# EAGLE board CT_schematic (EAGLE 7.6.0)

Size 100 x 80 mm. Coordinates in mm from the lower left corner, seen from the top.
Outline: 0,0 100,0 100,80 0,80 0,0
Copper layers (1*16): Top 0.035mm / dielectric 1.5mm / Bottom 0.035mm
Design rules "default": minimum track width 10mil, minimum drill 24mil, track to track 8mil, track to pad 8mil, pad to pad 8mil, via to via 8mil, smd to smd 8mil, copper to edge 40mil, drill to drill 8mil, minimum pad ring 10mil, minimum via ring 8mil, stop-mask expansion 4mil, vias tented up to drill 0mil, thermal gap 10mil

## Footprints (pad centres in the part's own frame; a part is rotated, then mirrored left to right if it is on the bottom)
C0603 = smd 0.8 x 0.8: 1 -0.762,0; 2 0.762,0
C0402 = smd 0.5 x 0.5: 1 -0.508,0; 2 0.508,0
C0805 = smd 1.2 x 1.3: 1 -1.016,0; 2 1.016,0
C1206 = smd 1.3 x 1.6: 1 -1.524,0; 2 1.524,0
L0603 = smd 0.8 x 0.8: 1 -0.762,0; 2 0.762,0
DR1040 = smd 1.6 x 3.2: 1 -4.458,0; 2 4.458,0
R0603 = smd 0.8 x 0.8: 1 -0.762,0; 2 0.762,0
WLCSP104 = smd 0.229 x 0.229: A1 -1.6,2.2; A2 -1.2,2.2; A3 -0.8,2.2; A4 -0.4,2.2; A5 0,2.2; A6 0.4,2.2; A7 0.8,2.2; A8 1.2,2.2; A9 1.6,2.2; B1 -1.6,1.8; B2 -1.2,1.8; B3 -0.8,1.8; B4 -0.4,1.8; B5 0,1.8; B6 0.4,1.8; B7 0.8,1.8; B8 1.2,1.8; B9 1.6,1.8; C1 -1.6,1.4; C2 -1.2,1.4; C3 -0.8,1.4; C4 -0.4,1.4; C5 0,1.4; C6 0.4,1.4; C7 0.8,1.4; C8 1.2,1.4; C9 1.6,1.4; D1 -1.6,1; D2 -1.2,1; D3 -0.8,1; D4 -0.4,1; D5 0,1; D6 0.4,1; D7 0.8,1; D8 1.2,1; D9 1.6,1; E1 -1.6,0.6; E2 -1.2,0.6; E3 -0.8,0.6; E4 -0.4,0.6; E6 0.4,0.6; E7 0.8,0.6; E8 1.2,0.6; E9 1.6,0.6; F1 -1.6,0.2; F2 -1.2,0.2; F3 -0.8,0.2; F4 -0.4,0.2; F6 0.4,0.2; F7 0.8,0.2; F8 1.2,0.2; F9 1.6,0.2; G1 -1.6,-0.2; G2 -1.2,-0.2; G3 -0.8,-0.2; G4 -0.4,-0.2; G6 0.4,-0.2; G7 0.8,-0.2; G8 1.2,-0.2; G9 1.6,-0.2; H1 -1.6,-0.6; H2 -1.2,-0.6; H3 -0.8,-0.6; H4 -0.4,-0.6; H6 0.4,-0.6; H7 0.8,-0.6; H8 1.2,-0.6; H9 1.6,-0.6; J1 -1.6,-1; J2 -1.2,-1; J3 -0.8,-1; J4 -0.4,-1; J5 0,-1; J6 0.4,-1; J7 0.8,-1; J8 1.2,-1; J9 1.6,-1; K1 -1.6,-1.4; K2 -1.2,-1.4; K3 -0.8,-1.4; K4 -0.4,-1.4; K5 0,-1.4; K6 0.4,-1.4; K7 0.8,-1.4; K8 1.2,-1.4; K9 1.6,-1.4; L1 -1.6,-1.8; L2 -1.2,-1.8; L3 -0.8,-1.8; L4 -0.4,-1.8; L5 0,-1.8; L6 0.4,-1.8; L7 0.8,-1.8; L8 1.2,-1.8; L9 1.6,-1.8; M1 -1.6,-2.2; M2 -1.2,-2.2; M3 -0.8,-2.2; M4 -0.4,-2.2; M5 0,-2.2; M6 0.4,-2.2; M7 0.8,-2.2; M8 1.2,-2.2; M9 1.6,-2.2
SOIC-8 = smd 1.6 x 0.6: 1 -2.7,1.905 | smd 1.55 x 0.6: 2 -2.7,0.635; 3 -2.7,-0.635; 4 -2.7,-1.905; 5 2.7,-1.905; 6 2.7,-0.635; 7 2.7,0.635; 8 2.7,1.905
LGA14R35P5X6_200X200X100 = smd 0.35 x 0.15: 1 -0.8,0.525; 2 -0.8,0.175; 3 -0.8,-0.175; 4 -0.8,-0.525; 8 0.8,-0.525; 9 0.8,-0.175; 10 0.8,0.175; 11 0.8,0.525 | smd 0.15 x 0.35: 5 -0.35,-0.8; 6 0,-0.8; 7 0.35,-0.8; 12 0.35,0.8; 13 0,0.8; 14 -0.35,0.8
FCI_10118193-0001LF = smd 0.4 x 1.35: 1 -1.3,2.675; 2 -0.65,2.675; 3 0,2.675; 4 0.65,2.675; 5 1.3,2.675 | smd 1.6 x 1.4: 6 -3.2,2.45; 7 3.2,2.45 | smd 1.9 x 1.9: 8 -1.2,0; 9 1.2,0 | hole 0.5: -3.3,0; 3.3,0
SOT143B = smd 1 x 0.7: 1 -0.75,-1 | smd 0.6 x 0.7: 2 0.95,-1; 3 0.95,1; 4 -0.95,1
ABS07-32.768KHZ-7-T = smd 1.1 x 2.4: 1 -2.5,0; 2 0,0
ASFL1 = smd 1.7 x 1.5: 1 -1.27,-1.1; 2 1.27,-1.1; 3 1.27,1.1; 4 -1.27,1.1
TSOT-23-5 = smd 1.3 x 0.62: 1 -1.31,0.95; 2 -1.31,0; 3 -1.31,-0.95; 4 1.31,-0.95; 5 1.31,0.95
DFN8_2X3MC = smd 0.813 x 0.305: 1 -1.398,0.75; 2 -1.398,0.25; 3 -1.398,-0.25; 4 -1.398,-0.75; 5 1.398,-0.75; 6 1.398,-0.25; 7 1.398,0.25; 8 1.398,0.75 | smd 1.753 x 1.549: 9 0,0
JST-2-SMD = smd 1 x 4.6: 1 -1,-3.7; 2 1,-3.7 | smd 1.6 x 3.4: NC1 -3.4,1.5; NC2 3.4,1.5
SON-6 = smd 0.55 x 0.3: 1 -0.355,0.5 | smd 0.52 x 0.3: 2 -0.37,0; 3 -0.37,-0.5; 4 0.37,-0.5; 5 0.37,0; 6 0.37,0.5
SW_4-1437565-2 = smd 1.4 x 2.1: 1 -2.23,4.55; 2 -2.23,-4.55; 3 2.23,4.55; 4 2.23,-4.55
LGM67K-G1J2-24-Z = smd 0.8 x 1.4: A -2,0; C 0,0
NC7SZ125M5X = smd 1.3 x 0.7: 1 -1.3,0.95; 2 -1.3,0; 3 -1.3,-0.95; 4 1.3,-0.95; 5 1.3,0.95
DUMMY_PACKAGE_128 = drill 0.3: 1 0,-1; 2 1.5,-1; 3 3,-1

## Placement (x,y rotation side)
C1  1e-07  [C0603]  -27.94,46.99 0 top  (outside the outline)
C2  1e-07  [C0603]  -31.75,46.99 0 top  (outside the outline)
C3  1e-07  [C0603]  -35.56,46.99 0 top  (outside the outline)
C4  1e-07  [C0603]  -39.37,46.99 0 top  (outside the outline)
C5  1e-07  [C0603]  -43.18,46.99 0 top  (outside the outline)
C6  1e-07  [C0603]  -46.99,46.99 0 top  (outside the outline)
C7  1e-07  [C0603]  -50.8,46.99 0 top  (outside the outline)
C8  4.7e-06  [C0603]  -24.13,46.99 0 top  (outside the outline)
C9  1e-07  [C0603]  -54.61,46.99 0 top  (outside the outline)
C10  1e-08  [C0603]  -58.42,46.99 0 top  (outside the outline)
C11  1e-06  [C0603]  -15.24,52.07 0 top  (outside the outline)
C12  1e-11  [C0402]  -45.72,52.07 0 top  (outside the outline)
C13  1e-11  [C0402]  -49.53,52.07 0 top  (outside the outline)
C14  1e-08  [C0402]  -53.34,52.07 0 top  (outside the outline)
C15  1e-07  [C0402]  -57.15,52.07 0 top  (outside the outline)
C16  1e-07  [C0402]  -15.24,57.15 0 top  (outside the outline)
C17  1e-08  [C0402]  -19.05,57.15 0 top  (outside the outline)
C18  1e-05  [C0805]  -41.91,34.29 0 top  (outside the outline)
C19  1e-05  [C0805]  -46.99,34.29 0 top  (outside the outline)
C20  1e-07  [C0402]  -22.86,57.15 0 top  (outside the outline)
C21  1e-05  [C1206]  -24.13,34.29 0 top  (outside the outline)
C22  1e-05  [C1206]  -30.48,34.29 0 top  (outside the outline)
C23  1e-08  [C0402]  -26.67,57.15 0 top  (outside the outline)
F1  240.0  [L0603]  -19.05,52.07 0 top  (outside the outline)
I1  3.8e-06  [DR1040]  -38.1,6.35 0 top  (outside the outline)
R2  1000.0  [R0603]  -22.86,52.07 0 top  (outside the outline)
R4  4700.0  [R0603]  -26.67,52.07 0 top  (outside the outline)
R5  2200.0  [R0603]  -30.48,52.07 0 top  (outside the outline)
R6  2200.0  [R0603]  -34.29,52.07 0 top  (outside the outline)
R7  10000.0  [R0603]  -30.48,41.91 0 top  (outside the outline)
R8  10000.0  [R0603]  -35.56,41.91 0 top  (outside the outline)
R9  10000.0  [R0603]  -40.64,41.91 0 top  (outside the outline)
R10  10000.0  [R0603]  -45.72,41.91 0 top  (outside the outline)
R11  10000.0  [R0603]  -50.8,41.91 0 top  (outside the outline)
R12  220000.0  [R0603]  -15.24,41.91 0 top  (outside the outline)
R13  1000000.0  [R0603]  -59.69,34.29 0 top  (outside the outline)
R14  10000.0  [R0603]  -55.88,41.91 0 top  (outside the outline)
R15  10000.0  [R0603]  -15.24,46.99 0 top  (outside the outline)
R16  9100.0  [R0603]  -38.1,52.07 0 top  (outside the outline)
R17  680000.0  [R0603]  -20.32,41.91 0 top  (outside the outline)
R18  120000.0  [R0603]  -25.4,41.91 0 top  (outside the outline)
R19  2000.0  [R0603]  -41.91,52.07 0 top  (outside the outline)
R20  10000.0  [R0603]  -20.32,46.99 0 top  (outside the outline)
U1  STM32L152VEY6TR  [WLCSP104]  -16.51,26.67 0 top  (outside the outline)
U2  AT25080B-SSHL-T  [SOIC-8]  -24.13,17.78 0 top  (outside the outline)
U3  BMC150  [LGA14R35P5X6_200X200X100]  -19.05,35.56 0 top  (outside the outline)
U4  10118193-0001LF  [FCI_10118193-0001LF]  -50.8,16.51 0 top  (outside the outline)
U5  prtr5v0u2ax  [SOT143B]  -39.37,57.15 0 top  (outside the outline)
U6  ABS07-32.768KHZ-7-T  [ABS07-32.768KHZ-7-T]  -36.83,26.67 0 top  (outside the outline)
U7  ASFL1-25MHZ-NCS  [ASFL1]  -41.91,16.51 0 top  (outside the outline)
U8  ltc3406es5  [TSOT-23-5]  -52.07,33.02 0 top  (outside the outline)
U9  MCP73831T-2ACI/MC  [DFN8_2X3MC]  -54.61,55.88 0 top  (outside the outline)
U10  S2B-PH-SM4-TB(LF)(SN)  [JST-2-SMD]  -53.34,6.35 0 top  (outside the outline)
U11  TPS3895ADRYR  [SON-6]  -48.26,55.88 0 top  (outside the outline)
U12  4-1437565-2  [SW_4-1437565-2]  -27.94,6.35 0 top  (outside the outline)
U13  Q65110A2395  [LGM67K-G1J2-24-Z]  -45.72,25.4 0 top  (outside the outline)
U14  nc7sz125m5x  [NC7SZ125M5X]  -35.56,33.02 0 top  (outside the outline)
U15  Dummy  [DUMMY_PACKAGE_128]  -45.72,57.15 0 top  (outside the outline)

## Library data of the parts
C1-C23 F1 I1 R2 R4-R20 U1-U15 = circuit_tree

## Nets
CLK_CRYSTAL_U1_D8: C12.1 U1.D8 U6.1
CLK_CRYSTAL_U1_D9: C13.1 U1.D9 U6.2
CLK_U1_F8: U1.F8 U7.3
GND: C1.2 C2.2 C3.2 C4.2 C5.2 C6.2 C7.2 C8.2 C9.2 C10.2 C11.2 C12.2 C13.2 C14.2 C15.2 C16.2 C17.2 C18.2 C19.1 C19.2 C20.2 C21.2 C22.2 C23.2 R2.2 R7.2 R12.2 R16.2 R18.2 R19.2 U1.A1 U1.C7 U1.D2 U1.E8 U1.H8 U1.J9 U1.K8 U1.L2 U1.M1 U2.4 U3.1 U3.6 U3.7 U3.9 U4.5 U4.6 U4.7 U4.8 U4.9 U5.1 U7.2 U8.2 U9.6 U9.9 U10.2 U11.2 U13.C U14.1 U14.3 U15.1
INPUT_USBPOWER_5V: C21.1 R20.2 U4.1 U5.4 U9.1 U9.2
NET_U1_A7: R7.1 U1.A7
NET_U1_B6: R6.1 U1.B6 U3.14
NET_U1_C5: R5.1 U1.C5 U3.11
NET_U1_E7: C9.1 U1.E7
NET_U1_F7: R4.1 U1.F7 U14.4
NET_U1_G6: C10.1 C11.1 F1.1 U1.G6 U1.G7
NET_U1_M7: U13.A
NET_U1_M8: U12.3 U12.4
NET_U2_3: R8.1 U2.3
NET_U2_7: R10.1 U2.7
NET_U8_1: U8.1
NET_U8_3: I1.1 U8.3
NET_U8_5: R12.1 R13.1 U8.5
NET_U8_ATNET_3: I1.2 R13.2
NET_U9_5: R20.1 U9.5
NET_U9_8: R19.1 U9.8
NET_U11_1: R15.1 R16.1 U11.1
NET_U11_3: R17.2 R18.1 U11.3
NET_U11_4: R14.1 U11.4 U14.2
NET_U12_1: R2.1 U12.1 U12.2
PROC_SPI1_MISO: U1.A5 U2.2
PROC_SPI1_MOSI: U1.A6 U2.5
PROC_SPI1_NSS: R9.1 U1.B1 U2.1
PROC_SPI1_SCK: U1.B5 U2.6
PROC_TIM10_CH1: U1.B7 U15.2
PROC_TIM11_CH1: U1.A8 U15.3
PROC_USB_DM: U1.E1 U4.2 U5.3
PROC_USB_DP: U1.E2 U4.3 U5.2
VCC_S1_3V7: C18.1 C22.1 U8.4 U9.3 U9.4 U10.1
VCC_TIER1_3V3: C1.1 C2.1 C3.1 C4.1 C5.1 C6.1 C7.1 C8.1 C14.1 C15.1 C16.1 C17.1 C19.2 C20.1 C23.1 F1.2 I1.2 R4.2 R5.2 R6.2 R8.2 R9.2 R10.2 R11.1 R11.2 R13.2 R14.2 R15.2 R17.1 U1.A9 U1.B8 U1.C1 U1.E9 U1.K3 U1.L8 U1.M9 U2.8 U3.8 U3.10 U3.12 U3.13 U7.4 U11.6 U14.5

## Tracks (layer width: path | path; a pad name or v marks a point on that pad's centre or on a via)
CLK_CRYSTAL_U1_D8  (2 unrouted)
CLK_CRYSTAL_U1_D9  (2 unrouted)
CLK_U1_F8  (1 unrouted)
GND  (59 unrouted)
INPUT_USBPOWER_5V  (5 unrouted)
NET_U1_A7  (1 unrouted)
NET_U1_B6  (2 unrouted)
NET_U1_C5  (2 unrouted)
NET_U1_E7  (1 unrouted)
NET_U1_F7  (2 unrouted)
NET_U1_G6  (4 unrouted)
NET_U1_M8  (1 unrouted)
NET_U2_3  (1 unrouted)
NET_U2_7  (1 unrouted)
NET_U8_3  (1 unrouted)
NET_U8_5  (2 unrouted)
NET_U8_ATNET_3  (1 unrouted)
NET_U9_5  (1 unrouted)
NET_U9_8  (1 unrouted)
NET_U11_1  (2 unrouted)
NET_U11_3  (2 unrouted)
NET_U11_4  (2 unrouted)
NET_U12_1  (2 unrouted)
PROC_SPI1_MISO  (1 unrouted)
PROC_SPI1_MOSI  (1 unrouted)
PROC_SPI1_NSS  (2 unrouted)
PROC_SPI1_SCK  (1 unrouted)
PROC_TIM10_CH1  (1 unrouted)
PROC_TIM11_CH1  (1 unrouted)
PROC_USB_DM  (2 unrouted)
PROC_USB_DP  (2 unrouted)
VCC_S1_3V7  (5 unrouted)
VCC_TIER1_3V3  (43 unrouted)